# Altium PCB Picocopter_Edit.PcbDoc
Units mil, origin at the board's own origin, x right, y up, seen from the top; angles counter-clockwise.
Board outline 3000 x 2750 mil, 2 copper layers (Top Layer, Bottom Layer); 56 components, 46 nets, 219 pads, 57 vias.
Unrouted connection lines stored in the file: 8.
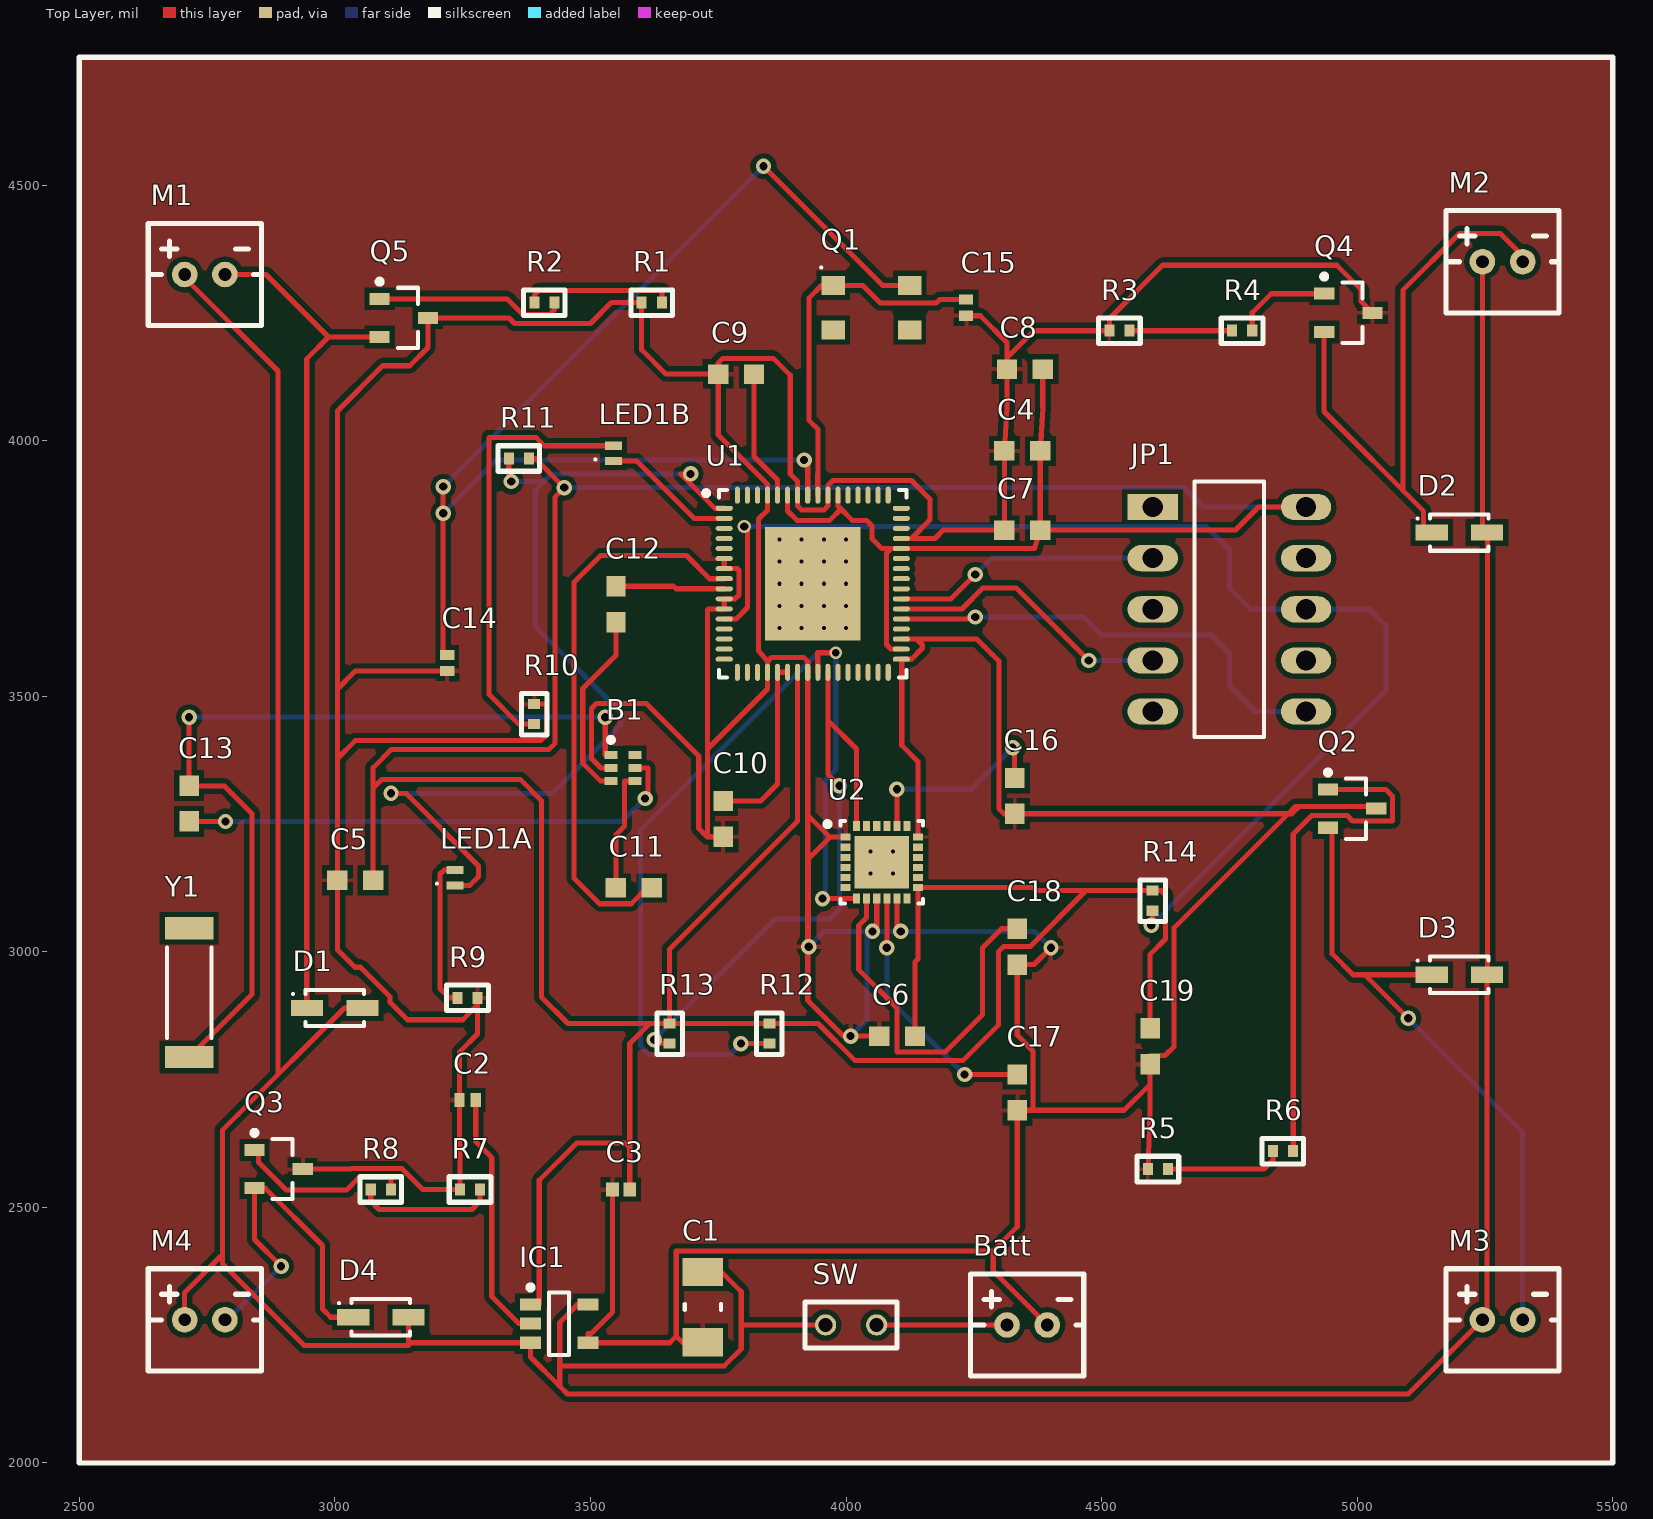
[diagram p0: Top Layer view]
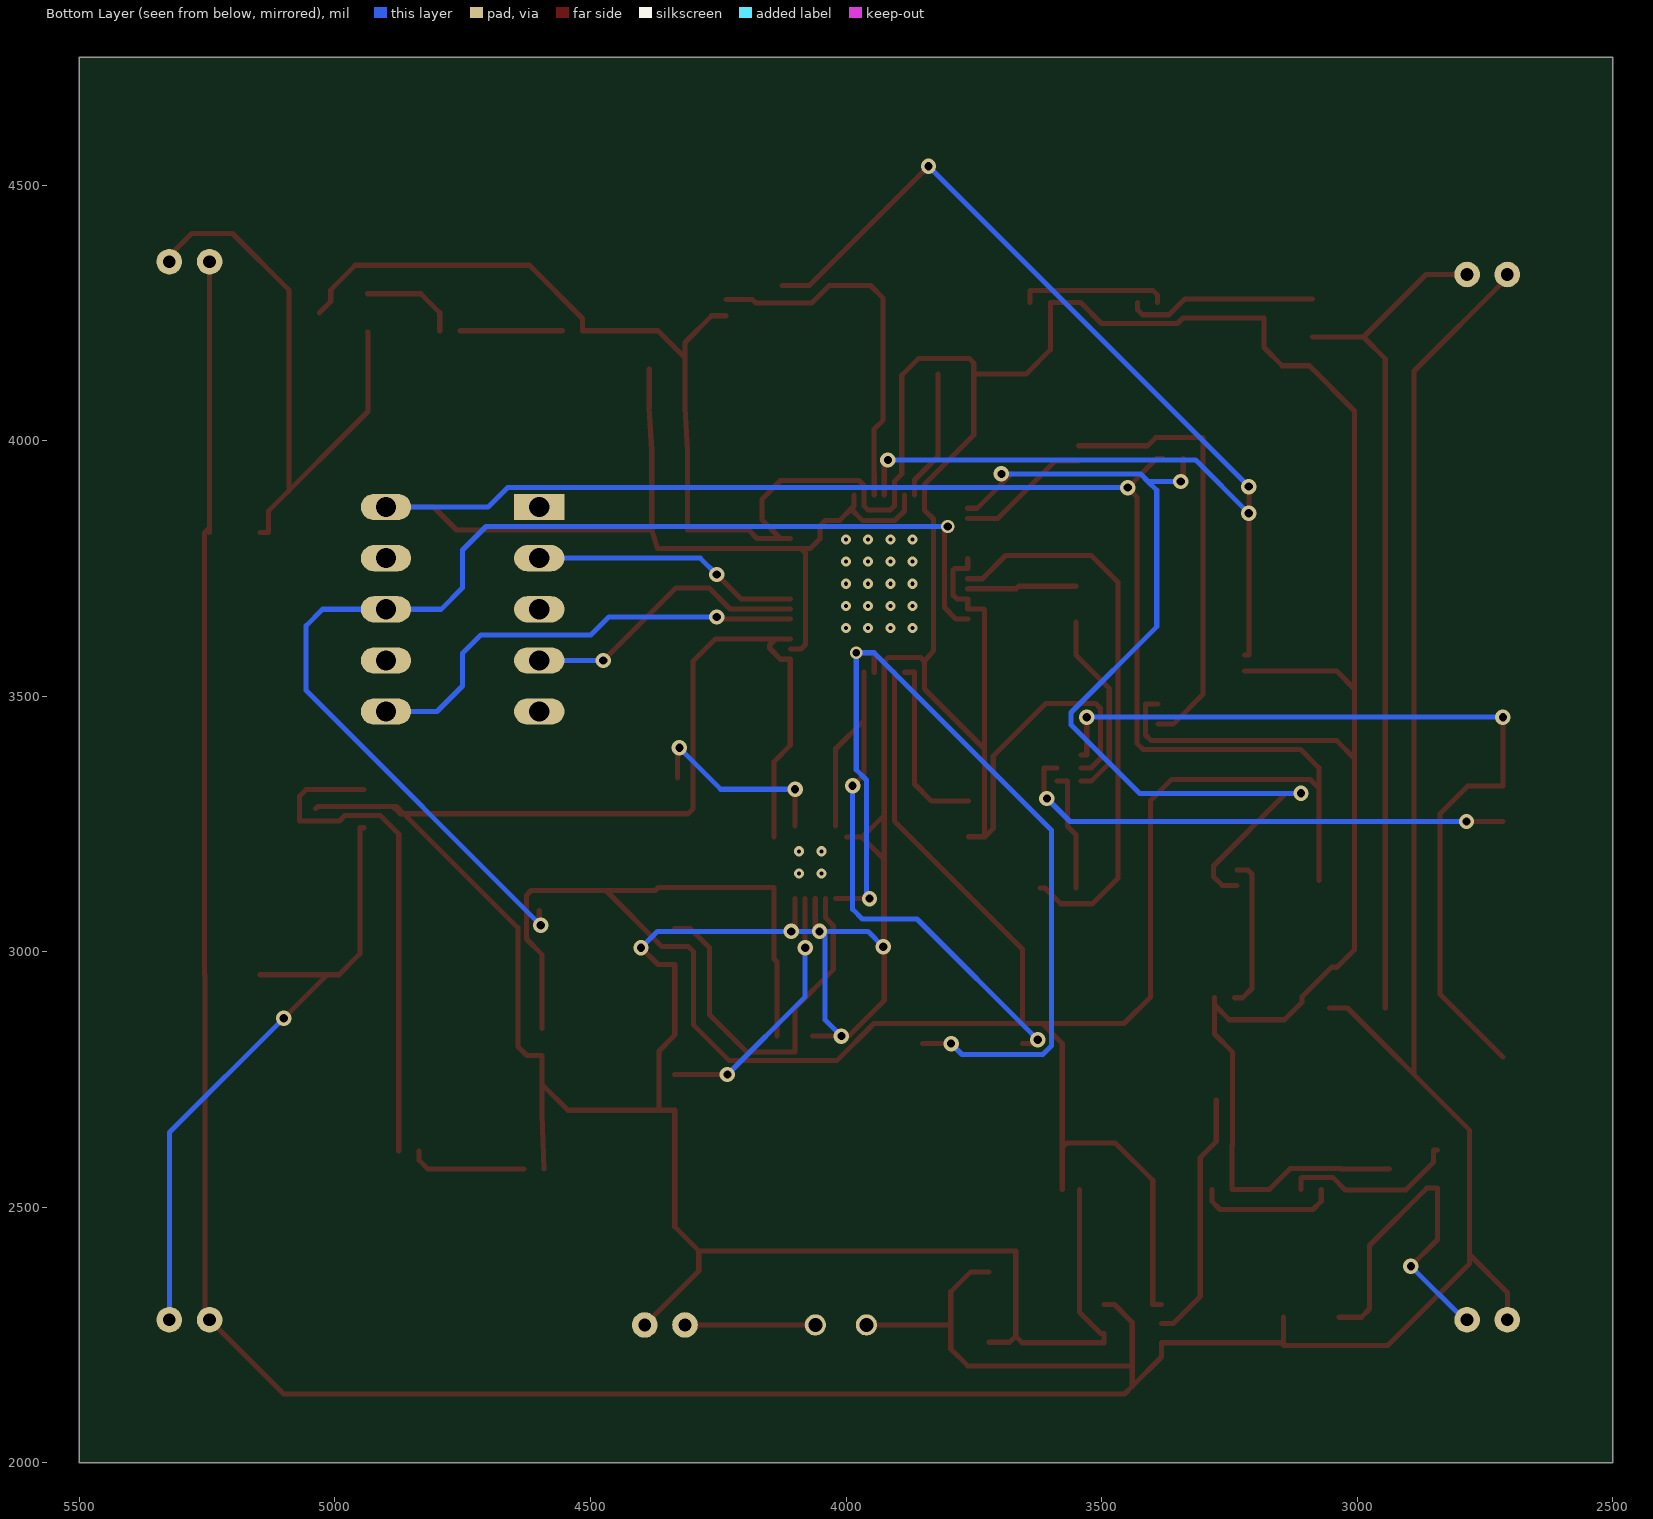
[diagram p1: Bottom Layer view, seen from below]

## Layer stack, top to bottom
Top Solder: solder mask 0.4, Solder Resist, Dk 3.5
Top Layer: signal copper 1.4
Dielectric 1: dielectric 12.6, FR-4, Dk 4.8
Bottom Layer: signal copper 1.4
Bottom Solder: solder mask 0.4, Solder Resist, Dk 3.5

## Board outline
2500,2000 5500,2000 5500,4750 2500,4750

## Design rules (kind name [scope] priority, off if disabled: settings)
Clearance [All] p1: gap=10 ignorepadtopadclearanceinfootprint=FALSE except(0: Arc-Hole Track-Hole SMDPad-Hole THPad-Hole Via-Hole Fill-Hole Poly-Hole Region-Hole Text-Hole)
Clearance "Clearance Same Net" [All] p2: gap=0 ignorepadtopadclearanceinfootprint=FALSE
ComponentClearance "Component Clearance" [All] p1: gap=0 collisioncheckmode=3 verticalgap=10 showdistances=FALSE
HoleSize "HoleSize~Sunstone Circuits" [All] p1: absolutevalues=TRUE maxlimit=251 minlimit=7.8 maxpercent=80.000 minpercent=20.000 // Sunstone Circuits Hole Size Rule (MLB~4&6 Layer Designs)
HoleSize Testpoint [All] p2: absolutevalues=TRUE maxlimit=100 minlimit=1 maxpercent=80.000 minpercent=20.000
HoleSize TestPointUsage [All] p3: absolutevalues=TRUE maxlimit=100 minlimit=1 maxpercent=80.000 minpercent=20.000
MinimumAnnularRing "MinimumAnnularRing~Sunstone Circuits" [All] p1: minimumring=5 // Sunstone Circuits Minimum Annular Ring (MLB~4&6 Layer Designs)
MinimumSolderMaskSliver [All] p1: minsoldermaskwidth=1.8
PlaneClearance "PlaneClearance~Sunstone Circuits" [All] p1: clearance=12 // Sunstone Circuits Power Plane Clearance Rule (MLB~4&6 Layer Designs)
PlaneConnect "PlaneConnect~Sunstone Circuits" [All] p1: planeconnectstyle=Relief reliefexpansion=10 reliefentries=4 reliefconductorwidth=8 reliefairgap=10 // Sunstone Circuits Power Plane Connect Rule (MLB~4&6 Layer Designs)
PolygonConnect "PolygonConnect~Sunstone Circuits" [All] p1: connectstyle=Relief reliefconductorwidth=8 reliefentries=4 polygonreliefangle="90 Angle" airgapwidth=10 // Sunstone Circuits Polygon Connect Style (MLB~4&6 Layer Designs)
RoutingVias "RoutingVias~Sunstone Circuits" [All] p1: holewidth=16 width=30 viastyle="Through Hole" minholewidth=8 minwidth=24 maxholewidth=20 maxwidth=40 // Sunstone Circuits Routing Vias Rule (MLB~4&6 Layer Designs)
ShortCircuit "ShortCircuit~Sunstone Circuits" [All] p1: allowed=TRUE // Sunstone Circuits Short Circuit Rule~Do Not Allow (MLB~4&6 Layer Designs)
SilkToSolderMaskClearance [IsPad] p1: minsilkscreentomaskgap=6 clearancetoexposedcopper=TRUE
SolderMaskExpansion "SolderMaskExpansion~Sunstone Circuits" [All] p1: expansion=3 // Sunstone Circuits Solder Mask Expansion Rule (MLB~4&6 Layer Designs)
ViasUnderSMD "ViasUnderSMD~Sunstone Circuits" [All] p1: allowed=FALSE // Sunstone Circuits Vias Under SMD~Do Not Allow (MLB~4&6 Layer Designs)
Width "Width~Sunstone Circuits" [All] p1: maxlimit=100 minlimit=6 preferedwidth=10 // Sunstone Circuits Minimum Width Rule (MLB~4&6 Layer Designs)
23 further rules are at their usual default settings.

## Components (designator, comment, footprint, x,y, rotation, side; value= is the part's Value field where it differs from the comment)
B1 "RF Balun" "2.45 GHz RF Balun" 3563.62,3359.41 r0 top
Batt "Battery" Battery 4315,2270 r0 top
C1 "220u" "1206 Capacitor" 3720,2305 r90 top
C2 "470p" "0201 Capacitor" 3260,2710 r0 top
C3 "10u" "0402 Capacitor" 3560,2535 r0 top
C4 "100n" "0603 Capacitor" 4345,3980 r0 top
C5 "0603 Capacitor" "0603 Capacitor" 3040,3140 r0 top
C6 "100n" "0603 Capacitor" 4100,2835 r0 top
C7 "0603 Capacitor" "0603 Capacitor" 4345,3825 r0 top
C8 "100n" "0603 Capacitor" 4350,4140 r0 top
C9 "1u" "0603 Capacitor" 3785,4130 r0 top
C10 "1u" "0603 Capacitor" 3760,3260 r90 top
C11 "22p" "0603 Capacitor" 3585,3125 r0 top
C12 "22p" "0603 Capacitor" 3550,3680 r90 top
C13 "0.47p" "0603 Capacitor" 2715,3290 r90 top
C14 "10p" "0201 Capacitor" 3220,3565 r90 top
C15 "10p" "0201 Capacitor" 4235,4260 r90 top
C16 "2n2" "0603 Capacitor" 4330,3305 r90 top
C17 "100n" "0603 Capacitor" 4335,2725 r90 top
C18 "10n" "0603 Capacitor" 4335,3010 r90 top
C19 "100n" "0603 Capacitor" 4595,2815 r90 top
D1 "Schottky Diode" "Schottky Diode" 3000,2890 r0 top
D2 "Schottky Diode" "Schottky Diode" 5200,3820 r0 top
D3 "Schottky Diode" "Schottky Diode" 5200,2955 r0 top
D4 "Schottky Diode" "Schottky Diode" 3090,2285 r0 top
IC1 "Vreg 3V3" "Voltage Regulator" 3438.9,2272.6 r0 top
JP1 "10 Pin Connector" "10 Pin Connector" 4600,3870 r0 top
LED1A "PicoLED" DFN70P60X45-2N 3235,3145 r90 top
LED1B "PicoLED" DFN70P60X45-2N 3545,3975 r90 top
M1 "Motor" Battery 2706.26,4325 r0 top
M2 "Motor" Battery 5245,4350 r0 top
M3 "Motor" Battery 5245,2280 r0 top (schematic designator M4)
M4 "Motor" Battery 2706.26,2280 r0 top (schematic designator M3)
Q1 "10MHz" DFN380P500X110-4N 4050,4260 r0 top
Q2 "N-Channel MOSFET" "N-Channel MOSFET" 4990,3280 r0 top
Q3 "N-Channel MOSFET" "N-Channel MOSFET" 2890,2575 r0 top
Q4 "N-Channel MOSFET" "N-Channel MOSFET" 4982.76,4250 r0 top
Q5 "MOSFET" "N-Channel MOSFET" 3135,4240 r0 top
R1 "10k" "0402 Resistor" 3620,4270 r0 top
R2 "220R" "0402 Resistor" 3410,4270 r0 top
R3 "10k" "0402 Resistor" 4535,4215 r0 top
R4 "220R" "0402 Resistor" 4775,4215 r0 top
R5 "10k" "0402 Resistor" 4610.31,2575 r0 top
R6 "220R" "0402 Resistor" 4854.69,2610 r0 top
R7 "10k" "0402 Resistor" 3264.68,2535 r0 top
R8 "220R" "0402 Resistor" 3090,2535 r0 top
R9 "1k" "0402 Resistor" 3259.68,2910 r0 top
R10 "1k" "0402 Resistor" 3390,3465 r90 top
R11 "2k" "0402 Resistor" 3360,3965 r0 top
R12 "4k7" "0402 Resistor" 3850,2840 r90 top
R13 "4k7" "0402 Resistor" 3655,2840 r90 top
R14 "10k" "0402 Resistor" 4600,3100 r90 top
SW "2 Pin Header" "2 PIN HEADER" 3960,2270 r0 top
U1 "Atmega 128" "Atmega 128" 3935,3720 r0 top
U2 "MPU-6000" Accelerometer 4070,3175 r0 top
Y1 "2.4GHz Bluetooth" "2.4GHz Bluetooth" 2715,2920 r90 top

## Footprints (in the part's own frame and the unit in brackets; to place one, negate y for a bottom-side part, rotate by r counter-clockwise, add the part's x,y. Pads: shape width x height; smd on the part's side, far side on the other; paste and mask are expansions set on the pad)
"2 PIN HEADER" [mm]
  round 1.056 hole 0.7: 1(0,0) 2(2.54,0)
  silkscreen extent -1.02,-1.14 3.56,1.14
"2.4GHz Bluetooth" [mm] "Chip Capacitor, 2-Leads, Body 6.55x2.20mm, IPC Medium Density"
  rect 1.1x2.4 smd: 1(-3.2,0) 2(3.2,0)
  silkscreen extent -2.25,-1.1 2.25,1.1, body extent -3.4,-1.2 3.4,1.2, height 1
"2.45 GHz RF Balun" [mm] "SOTFL, 6-Leads, Body 2.00x1.25mm, Pitch 0.65mm, IPC Medium Density"
  rect 0.65x0.4 smd: 1(-0.6,0.65) 2(-0.6,0) 3(-0.6,-0.65) 4(0.6,-0.65) 5(0.6,0) 6(0.6,0.65)
  silkscreen extent -0.72,1.28 -0.47,1.52, body extent -0.67,-1.05 0.68,1.05, height 0.95
"10 Pin Connector" [mm]
  rect 2.5x1.3 hole 1: 1(0,0)
  oval 2.5x1.3 hole 1: 2(0,-2.54) 3(0,-5.08) 4(0,-7.62) 5(0,-10.16) 6(7.62,-10.16) 7(7.62,-7.62) 8(7.62,-5.08) 9(7.62,-2.54) 10(7.62,0)
  silkscreen extent 2.08,-11.43 5.54,1.27, body extent 1.14,-12.19 6.22,1.01, height 9.93
"0201 Capacitor" [mm] "Chip Capacitor, 2-Leads, Body 0.75x0.40mm, IPC Medium Density"
  rect 0.5x0.7 smd: 1(-0.4,0) 2(0.4,0)
  body extent -0.55,-0.3 0.55,0.3, height 0.6
"0402 Capacitor" [mm] "Chip Capacitor, 2-Leads, Body 1.00x0.50mm, IPC Medium Density"
  rect 0.635x0.72 smd: 1(-0.43,0) 2(0.43,0)
  body extent -0.6,-0.35 0.6,0.35, height 0.7
"0402 Resistor" [mm]
  rect 0.5x0.6 smd: 1(-0.5,0) 2(0.5,0)
  silkscreen extent -1.04,-0.64 1.03,0.64
"0603 Capacitor" [mil] "Chip Capacitor, 2-Leads, Body 1.50x0.80mm, IPC Medium Density"
  rect 40x38 smd: 1(-35,0) 2(35,0)
  body extent -39,-20 39,20, height 39
"1206 Capacitor" [mm] "Chip Capacitor, 2-Leads, Body 3.20x1.60mm, IPC Medium Density"
  rect 1.4x2 smd: 1(-1.75,0) 2(1.75,0)
  silkscreen extent -0.15,-0.9 0.15,0.9, body extent -1.75,-0.95 1.75,0.95, height 1.9
Accelerometer [mm] "PQFN, 24-Leads, Body 4.00x4.00mm, Pitch 0.50mm, Thermal Pad 2.70x2.60mm, IPC Medium Density"
  rect 0.5x0.35 smd: 1(-1.8,1.25) 2(-1.8,0.75) 3(-1.8,0.25) 4(-1.8,-0.25) 5(-1.8,-0.75) 6(-1.8,-1.25) 13(1.8,-1.25) 14(1.8,-0.75) 15(1.8,-0.25) 16(1.8,0.25) 17(1.8,0.75) 18(1.8,1.25)
  rect 0.35x0.5 smd: 7(-1.25,-1.8) 8(-0.75,-1.8) 9(-0.25,-1.8) 10(0.25,-1.8) 11(0.75,-1.8) 12(1.25,-1.8) 19(1.25,1.8) 20(0.75,1.8) 21(0.25,1.8) 22(-0.25,1.8) 23(-0.75,1.8) 24(-1.25,1.8)
  rect 2.7x2.6 smd: 25(0,0)
  silkscreen extent -2.82,-2.05 2.05,2.05, body extent -2.05,-2.05 2.05,2.05, height 0.95
"Atmega 128" [mm] "QFN, 64-Leads, Body 9.00x9.00mm, Pitch 0.50mm, Thermal Pad 4.75x5.65mm, IPC Medium Density"
  oval 0.85x0.25 smd: 1(-4.4,3.75) 2(-4.4,3.25) 3(-4.4,2.75) 4(-4.4,2.25) 5(-4.4,1.75) 6(-4.4,1.25) 7(-4.4,0.75) 8(-4.4,0.25) 9(-4.4,-0.25) 10(-4.4,-0.75) 11(-4.4,-1.25) 12(-4.4,-1.75) 13(-4.4,-2.25) 14(-4.4,-2.75) 15(-4.4,-3.25) 16(-4.4,-3.75) 33(4.4,-3.75) 34(4.4,-3.25) 35(4.4,-2.75) 36(4.4,-2.25) 37(4.4,-1.75) 38(4.4,-1.25) 39(4.4,-0.75) 40(4.4,-0.25) 41(4.4,0.25) 42(4.4,0.75) 43(4.4,1.25) 44(4.4,1.75) 45(4.4,2.25) 46(4.4,2.75) 47(4.4,3.25) 48(4.4,3.75)
  oval 0.25x0.85 smd: 17(-3.75,-4.4) 18(-3.25,-4.4) 19(-2.75,-4.4) 20(-2.25,-4.4) 21(-1.75,-4.4) 22(-1.25,-4.4) 23(-0.75,-4.4) 24(-0.25,-4.4) 25(0.25,-4.4) 26(0.75,-4.4) 27(1.25,-4.4) 28(1.75,-4.4) 29(2.25,-4.4) 30(2.75,-4.4) 31(3.25,-4.4) 32(3.75,-4.4) 49(3.75,4.4) 50(3.25,4.4) 51(2.75,4.4) 52(2.25,4.4) 53(1.75,4.4) 54(1.25,4.4) 55(0.75,4.4) 56(0.25,4.4) 57(-0.25,4.4) 58(-0.75,4.4) 59(-1.25,4.4) 60(-1.75,4.4) 61(-2.25,4.4) 62(-2.75,4.4) 63(-3.25,4.4) 64(-3.75,4.4)
  rect 4.75x5.65 smd: 65(0,0)
  silkscreen extent -5.42,-4.65 4.65,4.65, body extent -4.5,-4.5 4.5,4.5, height 0.9
Battery [mm]
  round 1.27 hole 0.635: 1(0,0) 2(2,0)
  silkscreen extent -1.81,-2.54 3.81,2.54
DFN70P60X45-2N [mm] "DFN, 2-Leads, Body 1.00x0.60mm, Pitch 0.70mm, IPC Medium Density"
  rect 0.4x0.85 smd: 1(-0.381,0) 2(0.381,0)
  silkscreen extent -0.35,0.85 -0.25,0.95, body extent -0.3,-0.5 0.3,0.5, height 0.45
DFN380P500X110-4N [mm] "DFN, 4-Leads, Body 3.20x5.00mm, Pitch 3.80mm, IPC Medium Density"
  rect 1.15x0.95 smd: 1(-1.9,1.1) 2(1.9,1.1) 3(1.9,-1.1) 4(-1.9,-1.1)
  silkscreen extent -2.55,1.95 -2.45,2.05, body extent -2.5,-1.6 2.5,1.6, height 1.1
"N-Channel MOSFET" [mm] "SOT23, 3-Leads, Body 2.92x2.37mm, Pitch 0.95mm, IPC Medium Density"
  rect 1x0.6 smd: 1(-1.2,0.95) 2(-1.2,-0.95) 3(1.2,0)
  silkscreen extent -1.32,-1.5 0.7,1.92, body extent -0.7,-1.52 0.7,1.52, height 1.12
"Schottky Diode" [mm] "SODFL, 2-Leads, Body 1.60x3.70mm, IPC Medium Density"
  rect 1.6x0.8 smd: 1(-1.375,0) 2(1.375,0)
  silkscreen extent -2.12,-0.9 1.45,0.9, body extent -1.43,-0.9 1.42,0.9, height 1.35
"Voltage Regulator" [mm] "SOT23, 5-Leads, Body 2.90x2.70mm, Pitch 0.95mm, IPC Medium Density"
  rect 1.05x0.6 smd: 1(-1.425,0.95) 2(-1.425,0) 3(-1.425,-0.95) 4(1.425,-0.95) 5(1.425,0.95)
  silkscreen extent -1.55,-1.55 0.5,1.92, body extent -0.9,-1.55 0.9,1.55, height 1.45

## Part data
B1: library part "2.45 GHz RF Balun"
C1: library part "1206 Capacitor"
C2 C14 C15: library part "10 pF Capacitor"
C3: library part "0402 Capacitor"
C4 C6 C8 C9 C10 C11 C12 C13 C16 C17 C18 C19: library part "0603 Capacitor"
IC1: library part "Voltage Regulator"
Q1: library part "16 MHz Crystal"
Q5: library part "N-Channel MOSFET"
R1 R2 R3 R4 R5 R6 R7 R8 R9 R10 R11 R12 R13 R14: library part "0402 Resistor"
U2: library part Accelerometer

## Via types
v1: diameter 30, hole 16, Top Layer to Bottom Layer, 31 vias
v2: diameter 19.68, hole 7.87, Top Layer to Bottom Layer, 24 vias
v3: diameter 26, hole 16, Top Layer to Bottom Layer, 1 vias
v4: diameter 25, hole 15, Top Layer to Bottom Layer, 1 vias

## Nets (pads, with @x,y where several pads share a name; then routed paths per layer and width w, separated by ;. In a path a pad name is that pad's centre, name@x,y a point inside that pad or via, vN(x,y) a via of type N, cw(c..) or ccw(c..) an arc to the next point about the centre after c; other vN are vias at no path point)
3V3: C3.2 C4.2 C5.2 C6.2 C7.2 C8.2 C19.2 IC1.1 JP1.10 R11.2 R12.2 R13.2 R14.2 U1.23 U1.34 U1.44 U1.54 U1.59 U2.13 | length 9122.4
  Top Layer w10: C5.2 3075,3320.12 ; R11.2 3392,3965 v1(3449,3908) 3431,3890 3431,3408 3419,3396 3111,3396 3075,3360 3075,3320.12 ; IC1.1 3400,2310 3400,2553 3473.07,2626.07 3568,2626.07 3576.93,2617.14 ; C3.2 3576.93,2617.14 ; U1.59 3885.79,3862.21 3904,3844 3968,3844 3990.11,3866.11 ; U1.23 3905.47,3256.11 3655,3005.64 R13.2 ; U1.54 3984.21,3872 3990.11,3866.11 ; U1.34 4088,3592.05 4079,3601.05 4079,3779.9 4088,3788.9 ; C6.2 4135,2980 4140.87,2985.87 U2.13 4367,3125.79 4373.1,3119.69 4469.69,3119.69 ; C8.2 4385,4065 C4.2 C7.2 ; C19.2 4595,2995 4624.98,3024.98 4624.98,3110.7 4616,3119.69 R14.2 4469.69,3119.69 ; JP1.10 4807,3870 4762,3825 C7.2 ; 3075,3320.12 3092.25,3337.37 3362.63,3337.37 3404,3296 3404,2911.69 3456,2859.69 3616,2859.69 ; 3576.93,2617.14 3576.93,2820.62 3616,2859.69 ; 3616,2859.69 R13.2 ; R13.2 R12.2 3945.31,2859.69 4018,2787 4228.5,2787 4298,2856.5 4298,3000 4308,3010 4360,3010 4469.69,3119.69 ; 3990.11,3866.11 4012.21,3844 4040,3844 4051,3833 4051,3808 4070.1,3788.9 4088,3788.9 ; 4088,3788.9 U1.44 4368.9,3788.9 C7.2
  Bottom Layer w10: v1(3449,3908) 4662,3908 4700,3870 JP1.10
GND: B1.2 C1.1 C2.1 C3.1 C4.1 C5.1 C6.1 C7.1 C8.1 C9.1 C10.1 C14.1 C15.1 C16.1 C17.1 C18.1 C19.1 IC1.4 Q2.3 Q3.3 Q4.3 Q5.3 R1.1 R3.1 R5.1 R7.1 R9.2 R10.2 U1.6 U1.7 U1.10 U1.11 U1.20 U1.24 U1.33 U1.35 U1.45 U1.55 U1.58 U1.61 U2.1 U2.9 U2.11 U2.18 | length 14887.7
  Top Layer w10: Q3.3 3031.47,2575 3032.28,2575.81 3131.19,2575.81 3172,2535 R7.1 3245,2622 3244.25,2622.75 C2.1 3244.25,2804.25 3279.37,2839.37 3279.37,2896 ; 3093.5,4146.5 3005,4058 3005,3514.25 ; Q5.3 3340.66,4240 3351.47,4229.19 3500.19,4229.19 3541,4270 R1.1 3600.32,4177.68 3648,4130 C9.1 ; C14.1 3040,3549.25 3005,3514.25 ; R9.2 3279.37,2896 ; R10.2 3414,3484.69 3414,3424 3403,3413 3040,3413 3005,3378 ; IC1.4 3495,2253 3501,2253 3543.07,2295.07 C3.1 ; B1.2 3520.59,3359.41 3502,3378 3502,3476 3512,3486 3609,3486 3712,3383 3712,3241 3728,3225 3729,3225 ; C1.1 3679.9,2236.1 3668,2248 3668,2415 4288,2415 4335,2462 C17.1 4366,2690 ; C10.1 3729,3225 ; U1.6 U1.7 3787.98,3749.53 3790.51,3747 3790.51,3697.98 3783,3690.47 U1.10 U1.11 3730.79,3670.79 3729,3669 3729,3396.58 ; U2.1 3968.79,3224.21 ; v1(4052,3040) 4060.16,3048.16 U2.9 ; C6.1 v1(4009,2835) 3995,2835 3925.16,2904.84 v1@3925.16,3011.84 ; U2.11 4099.53,3047.47 v1(4107,3040) ; U1.33 U1.33@4109,3572.36 ; U1.35 4138.16,3611.73 ; U1.45 4128,3808.58 ; U2.18 4141,3224.21 4141,3372 4109,3404 U1.33@4109,3572.36 ; C15.1 4262.75,4244.25 4315,4192 4315,4162 ; v1(4401,3008) 4368,2975 C18.1 4335,2837 4366,2806 4366,2690 ; R5.1 4595,2682.37 4595,2741 ; Q4.3 5008,4272 5008,4295 4960,4343 4619.32,4343 4515.32,4239 R3.1 4368,4215 4315,4162 ; Q2.3 5033.24,3284 4886,3284 ; 3005,3378 C5.1 3005,3004 3039.25,2969.75 3050.25,2969.75 3107.75,2912.25 3107.75,2901.25 3142,2867 3250.37,2867 3279.37,2896 ; 3005,3378 3005,3514.25 ; 3729,3225 3729,3396.58 ; 3729,3396.58 3846.42,3514 U1.20 3846.42,3568 ; C9.1 3750,4011 3846.42,3914.58 U1.61 3846.42,3864 3829,3846.58 3829,3589 3846.42,3568 ; C9.1 3750,4152 3759,4161 3857.84,4161 3890.84,4128 3890.84,3934.82 3905.47,3920.19 U1.58 3905.47,3872 3913.47,3864 3956.53,3864 3964.53,3872 U1.55 3964.53,3912 3974.53,3922 4128,3922 4164,3886 4164,3844.58 4128,3808.58 ; 3846.42,3568 3854.42,3576 3917.16,3576 3925.16,3568 U1.24 3925.16,3267.05 ; v1@3925.16,3011.84 v1(3927,3010) 3927,3182.42 3968.79,3224.21 ; v1@3925.16,3011.84 3925.16,3267.05 ; 3925.16,3267.05 3968.79,3224.21 ; U1.33@4109,3572.36 4128,3572.36 4149.89,3594.25 4149.89,3600 4138.16,3611.73 ; 4128,3808.58 4173.92,3808.58 4190.34,3825 C7.1 C4.1 4315,4065 C8.1 4315,4162 ; 4138.16,3611.73 4256,3611.73 4299,3568.73 4299,3280 4309,3270 C16.1 4865,3270 ; 4366,2690 4544,2690 4595,2741 ; 4595,2741 C19.1 4595,2797 4624,2797 4641.98,2814.98 4641.98,3046.98 4865,3270 ; 4865,3270 4879,3284 4886,3284 ; 4865,3270 4872,3270 4886,3284
  Bottom Layer w10: v1(3927,3010) 3957,3040 v1@4041,3040 ; v1(4009,2835) 4041,2867 v1@4041,3040 ; v1(4401,3008) 4369,3040 v1(4107,3040) v1(4052,3040) v1@4041,3040
MISO: JP1.2 U1.39 | length 524.7
  Top Layer w10: U1.39 4205.47,3690.47 v1(4253,3738)
  Bottom Layer w10: v1(4253,3738) 4285,3770 JP1.2
MOSI: JP1.4 U1.38 | length 567.7
  Top Layer w10: U1.38 4227,3670.79 4268.21,3712 4332.79,3712 v1(4474.79,3570)
  Bottom Layer w10: v1(4474.79,3570) JP1.4
NetB1_1: B1.1 C13.2 Y1.1 | length 1706.3
  Top Layer w10: Y1.1 2838,2917.02 2838,3270 2784,3324 2715,3324 C13.2 v1(2715,3459) ; v1(3529,3459) 3529,3385 B1.1
  Bottom Layer w10: v1(2715,3459) v1(3529,3459)
NetB1_3: B1.3 C12.1 | length 372.6
  Top Layer w10: B1.3 3520,3333.82 3485,3368.82 3485,3515 3550,3580 C12.1
NetB1_4: B1.4 C11.1 | length 236.1
  Top Layer w10: C11.1 3550,3229 3567,3246 3567,3333.82 B1.4
NetB1_5: B1.5 C13.1 | length 998.3
  Top Layer w10: C13.1 v1(2786,3255) ; B1.5 3613,3359.41 3613,3306 v1(3607,3300)
  Bottom Layer w10: v1(2786,3255) 3562,3255 v1(3607,3300)
NetC2_2: C2.2 IC1.2 | length 495.1
  Top Layer w10: C2.2 3275.75,2629 3307,2597.75 3307,2325.6 3360,2272.6 IC1.2
NetC9_2: C9.2 U1.60 | length 255.9
  Top Layer w10: C9.2 3820,3969.1 3866.1,3923 U1.60
NetC10_2: C10.2 U1.21 U1.22 | length 358.2
  Top Layer w10: C10.2 3833.1,3295 3866.1,3328 U1.21 U1.22
NetC11_2: C11.2 U1.8 | length 1098.6
  Top Layer w10: C11.2 3610.87,3125 3579.87,3094 3518,3094 3468,3144 3468,3723 3520,3775 3687.84,3775 3733,3729.84 U1.8
NetC12_2: C12.2 U1.9 | length 213.8
  Top Layer w10: C12.2 3662.46,3715 3667.3,3710.16 U1.9
NetC14_2: C14.2 Q1.2 U1.57 | length 2427.1
  Top Layer w10: v1(3212,3910) v1(3212,3858) 3212,3580.75 C14.2 ; v1(3838.65,4536.65) 4072,4303.31 Q1.2 ; v1(3918,3962) 3925.16,3954.84 U1.57
  Bottom Layer w10: v1(3212,3858) 3316,3962 v1(3918,3962) ; v1(3212,3910) v1(3838.65,4536.65)
NetC15_2: C15.2 Q1.1 U1.56 | length 727.7
  Top Layer w10: U1.56 3944.84,3934.84 3945,3935 3945,4022.27 3927.27,4040 3927.27,4278.57 3952,4303.31 Q1.1 4032.69,4303.31 4067,4269 4176.25,4269 4183,4275.75 C15.2
NetC16_2: C16.2 U2.20 | length 392.8
  Top Layer w10: U2.20 v1(4099.53,3318) ; v1(4326,3399) 4330,3395 C16.2
  Bottom Layer w10: v1(4099.53,3318) 4245,3318 v1(4326,3399)
NetC17_2: C17.2 U2.10 | length 510.2
  Top Layer w10: v1(4079.84,3008) U2.10 ; v1(4232,2760) C17.2
  Bottom Layer w10: v1(4079.84,3008) 4079.84,2912.16 v1(4232,2760)
NetC18_2: C18.2 U2.8 | length 749.2
  Top Layer w10: U2.8 4040.47,3067 4025,3051.53 4025,2965 4100,2890 4100,2804 4194,2804 4267,2877 4267,3008 4304,3045 C18.2
NetD1_1: D1.1 Q5.2 | length 1431.3
  Top Layer w10: D1.1 2945,2890 2945,4160 2987.6,4202.6 Q5.2
NetD2_1: D2.1 Q4.2 | length 489.7
  Top Layer w10: Q4.2 4935,4212.6 4935,4057 5130,3862 5130,3820 D2.1
NetD3_1: D3.1 Q2.2 | length 466.7
  Top Layer w10: Q2.2 4951,3242.6 4951,2996 4992,2955 D3.1
NetD4_1: D4.1 Q3.2 | length 370.7
  Top Layer w10: Q3.2 2864,2537.6 2976,2425.6 2976,2301 2992,2285 D4.1
NetLED1A_1: LED1A.1 R11.1 U1.1 | length 1899.8
  Top Layer w10: v1(3110,3310) 3139,3310 3281,3168 3281,3147 3264,3130 LED1A.1 ; R11.1 3340.32,3924.68 v1(3345,3920) ; v1(3696,3935) 3676,3935 3743.36,3867.64 U1.1
  Bottom Layer w10: v1(3110,3310) 3426,3310 3560,3444 3560,3468 3392,3636 3392,3903 3409,3920 ; v1(3345,3920) 3409,3920 ; v1(3696,3935) 3424,3935 3409,3920
NetLED1A_2: LED1A.2 R9.1 | length 297.8
  Top Layer w10: LED1A.2 3214,3160 3206,3152 3206,2928 3224,2910 R9.1
NetLED1B_1: LED1B.1 U1.2 | length 263.2
  Top Layer w10: LED1B.1 3590.55,3960 3702.6,3847.95 U1.2
NetLED1B_2: LED1B.2 R10.1 | length 864.8
  Top Layer w10: R10.1 3360,3445.32 3301.47,3503.84 3301.47,4005.81 3394,4005.81 3409.81,3990 LED1B.2
NetQ2_1: Q2.1 R6.2 | length 1014.3
  Top Layer w10: R6.2 4875,2610 4875,3230.41 4911,3266.41 4980.59,3266.41 4991,3256 5069,3256 5069,3304.4 5056,3317.4 Q2.1
NetQ3_1: Q3.1 R8.2 | length 346.7
  Top Layer w10: Q3.1 2851,2612.4 2851,2588 2905,2534 3023.19,2534 3048,2558.81 3107.87,2558.81 3109.69,2557 R8.2
NetQ4_1: Q4.1 R4.2 | length 191.4
  Top Layer w10: R4.2 4794.69,4250.09 4832,4287.4 Q4.1
NetQ5_1: Q5.1 R2.2 | length 372.9
  Top Layer w10: Q5.1 3336.79,4277.4 3368,4246.19 3419.87,4246.19 3429.69,4256 R2.2
NetR1_2: R1.2 R2.1 | length 291.7
  Top Layer w10: R2.1 3390.32,4284.32 3400,4294 3639.69,4294 R1.2
NetR3_2: R3.2 R4.1 | length 200.6
  Top Layer w10: R3.2 R4.1
NetR5_2: R5.2 R6.1 | length 230
  Top Layer w10: R5.2 4818,2575 4835,2592 R6.1
NetR7_2: R7.2 R8.1 | length 273.3
  Top Layer w10: R8.1 3070.32,2512 3086.32,2496 3268.37,2496 3284.37,2512 R7.2
OC1A: U1.41
OC1B: U1.42
OC1C: U1.43
OC3A: U1.49
RESET: JP1.8 R14.1 U1.12 | length 2400.6
  Top Layer w10: U1.12 3785.1,3651.1 3807.51,3673.51 3807.51,3825.49 v3(3801,3832) ; v1(4597,3052) 4600,3055 R14.1
  Bottom Layer w10: v3(3801,3832) 4704,3832 4750,3786 4750,3712 4792,3670 JP1.8 5024,3670 5056,3638 5056,3511 v1(4597,3052)
RXD0: U1.46
SCK: JP1.6 U1.37 | length 907.5
  Top Layer w10: U1.37 4249.1,3651.1 v1(4253,3655)
  Bottom Layer w10: v1(4253,3655) 4464,3655 4499,3620 4714,3620 4750,3584 4750,3520 4800,3470 JP1.6
SCL: R12.1 U1.25 U2.7 | length 1847.7
  Top Layer w10: v1(3794.32,2820.32) R12.1 ; U1.25 3944.84,3585 v4(3980,3585) ; v1(3954,3104) 4020.79,3104 U2.7
  Bottom Layer w10: v1(3794.32,2820.32) 3773,2799 3615,2799 3598,2816 3598,3238 3945,3585 v4(3980,3585) 3980,3356.18 3960,3336.18 3960,3110 v1(3954,3104)
SDA: R13.1 U1.26 U2.24 | length 1204.3
  Top Layer w10: v1(3625,2828) 3632.68,2820.32 R13.1 ; U1.26 3964.53,3453 ; v1(3987,3325) 3964.53,3347.47 3964.53,3453 ; U2.24 4020.79,3396.74 3964.53,3453
  Bottom Layer w10: v1(3625,2828) 3861,3064 3968,3064 3987,3083 v1(3987,3325)
TXD0: U1.47
VBATT: C1.2 D1.2 D2.2 D3.2 D4.2 IC1.3 IC1.5 | length 389.7
  Top Layer w10: D4.2@3144,2285 D4.2 ; 3440,2190 3762,2190 3795,2223 ; IC1.5@3475,2310 IC1.5 ; D3.2@5254.15,2955.1 D3.2@5255,2955
VBATT_CHG: JP1.9
pads on no net: B1.6 Batt.1 Batt.2 JP1.1 JP1.3 JP1.5 JP1.7 M1.1 M1.2 M2.1 M2.2 M3.1 M3.2 M4.1 M4.2 Q1.3 Q1.4 SW.1 SW.2 U1.3 U1.4 U1.5 U1.13 U1.14 U1.15 U1.16 U1.17 U1.18 U1.19 U1.27 U1.28 U1.29 U1.30 U1.31 U1.32 U1.36 U1.40 U1.48 U1.50 U1.51 U1.52 U1.53 U1.62 U1.63 U1.64 U1.65 U2.2 U2.3 U2.4 U2.5 U2.6 U2.12 U2.14 U2.15 U2.16 U2.17 U2.19 U2.21 U2.22 U2.23 U2.25 Y1.2
copper on no net: | length 10625.9
  Top Layer w10: 2706.26,2280 2706.26,2280.26 2706.26,2333.74 2777.52,2405 ; 2706.26,4325 2706.26,4318.74 2889,4136 2889,2760 ; 2785,4325 2865.2,4325 2987.6,4202.6 ; 2842.76,2537.6 2842.76,2437.24 v1(2895,2385) ; 3054.13,2890 3019,2890 2811,2682 2780,2651 2780,2390 2811,2359 2940,2230 3089,2230 3144,2230 ; 3093.5,4146.5 3146.5,4146.5 3182.24,4182.24 3182.24,4240 ; 3144,2231 3144,2285 ; 3148.2,2235.2 3382.8,2235.2 3382.8,2207.2 3440,2150 ; 3475,2310 3440,2275 3440,2150 ; 3495,2235.2 3655.2,2235.2 3668,2248 ; 3720,2373.9 3756.1,2373.9 3795,2335 3795,2270 ; 3795,2223 3795,2270 ; 3960,2270 3795,2270 ; 4060,2270 4315,2270 ; 4288,2415 4288,2375.74 4393.74,2270 ; 5015,2955 v1(5100,2870) ; 5090,3902 5090,4295 5200,4405 5280,4405 5323.74,4361.26 5323.74,4350 ; 5245,3820 5245,4350 ; 5245,3829.13 5254.13,3820 ; 5254.15,2955.1 5254.15,2289.15 5245,2280 5100,2135 3455,2135 3440,2150 ; 5255,2955 5255,3819.13
  Bottom Layer w10: 2785,2280 2790,2280 v1(2895,2385) ; v1(5100,2870) 5323.74,2646.26 5323.74,2280
  other v2: 4048.35,3153.35 4091.65,3153.35 4048.35,3196.65 4091.65,3196.65 3870.04,3633.39 3913.35,3633.39 3956.65,3633.39 3999.96,3633.39 3870.04,3676.69 3913.35,3676.69 3956.65,3676.69 3999.96,3676.69 3870.04,3720 3913.35,3720 3956.65,3720 3999.96,3720 3870.04,3763.31 3913.35,3763.31 3956.65,3763.31 3999.96,3763.31 3870.04,3806.61 3913.35,3806.61 3956.65,3806.61 3999.96,3806.61

## Polygon pours and split planes (outlines as drawn)
GND on Top Layer "Mechanical 1-No Net" (solid, remove dead copper, pour order 4): 2505,4750 2500,4745 2500,2000 5490,2000 5495,2005 5495,4750

## Silkscreen, mask and mechanical layers (free items; w line width, h text height)
Top Overlay:
  the board outline again, w10